# Altium PCB display_psb.PcbDoc
Units mm, origin at the board's own origin, x right, y up, seen from the top; angles counter-clockwise.
Board outline 49.78 x 32 mm, 2 copper layers (Top Layer, Bottom Layer); 35 components, 30 nets, 96 pads, 1 vias.
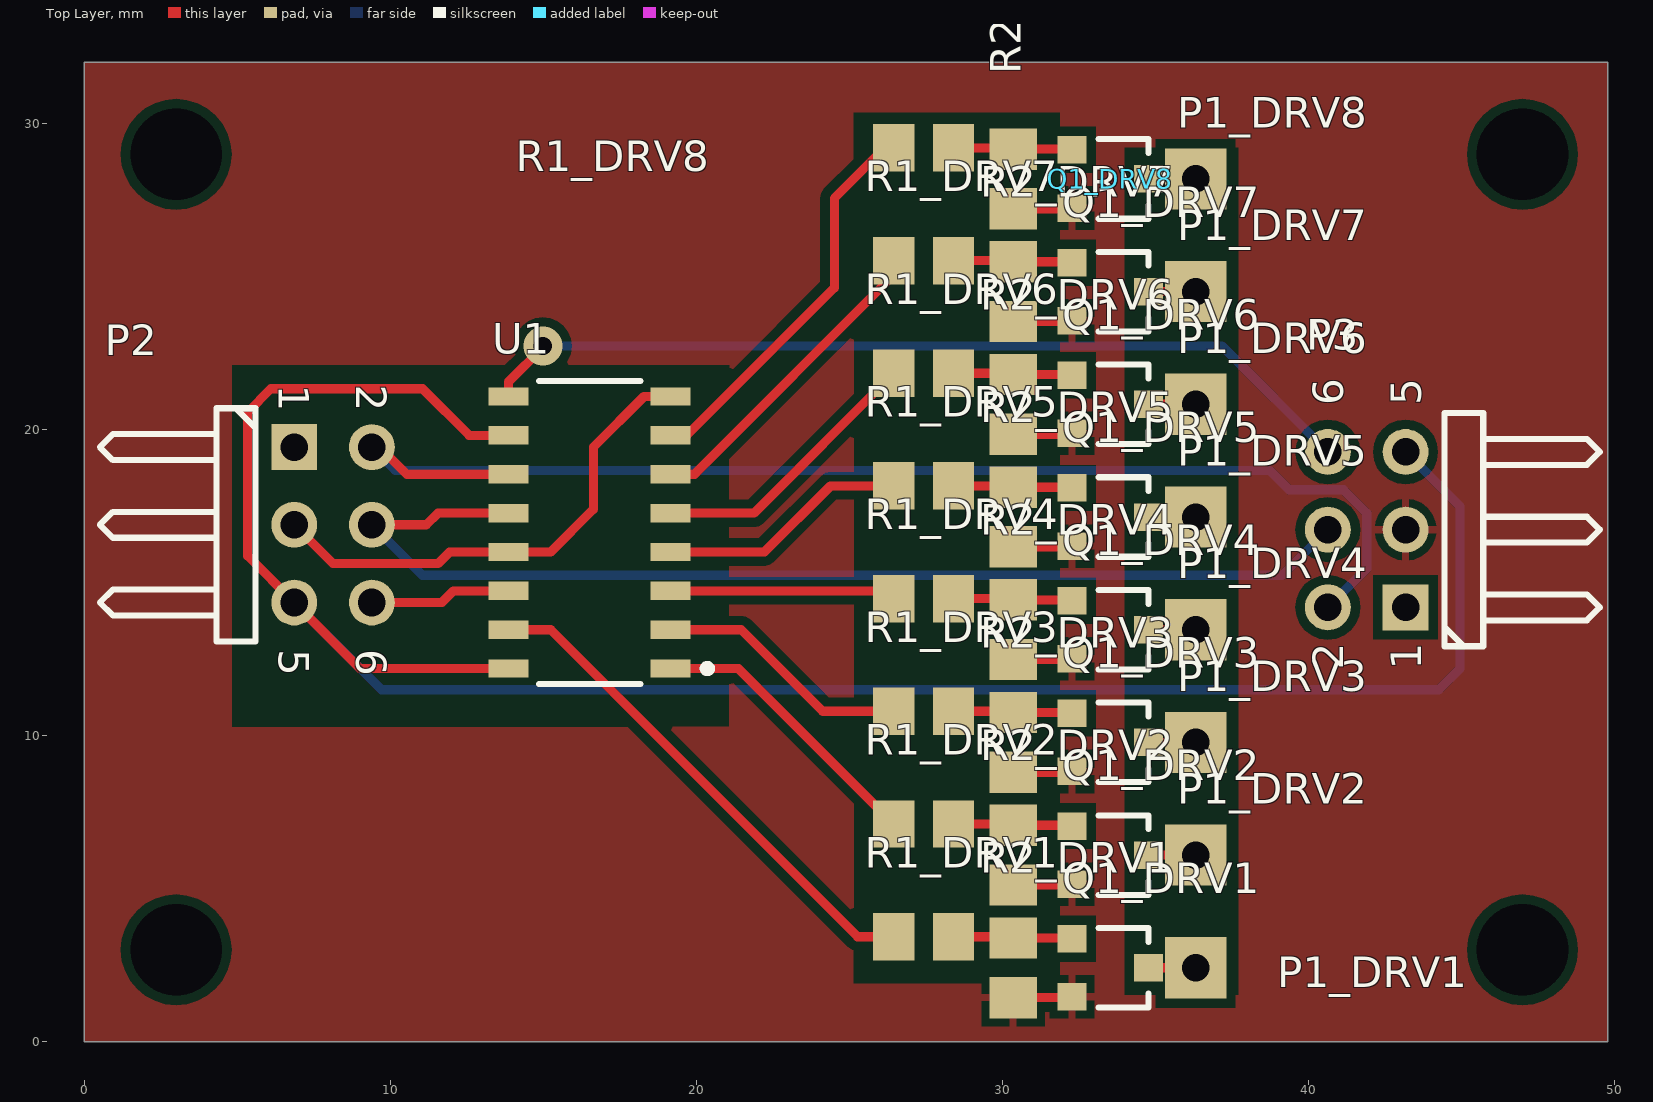
[diagram p0: Top Layer view]
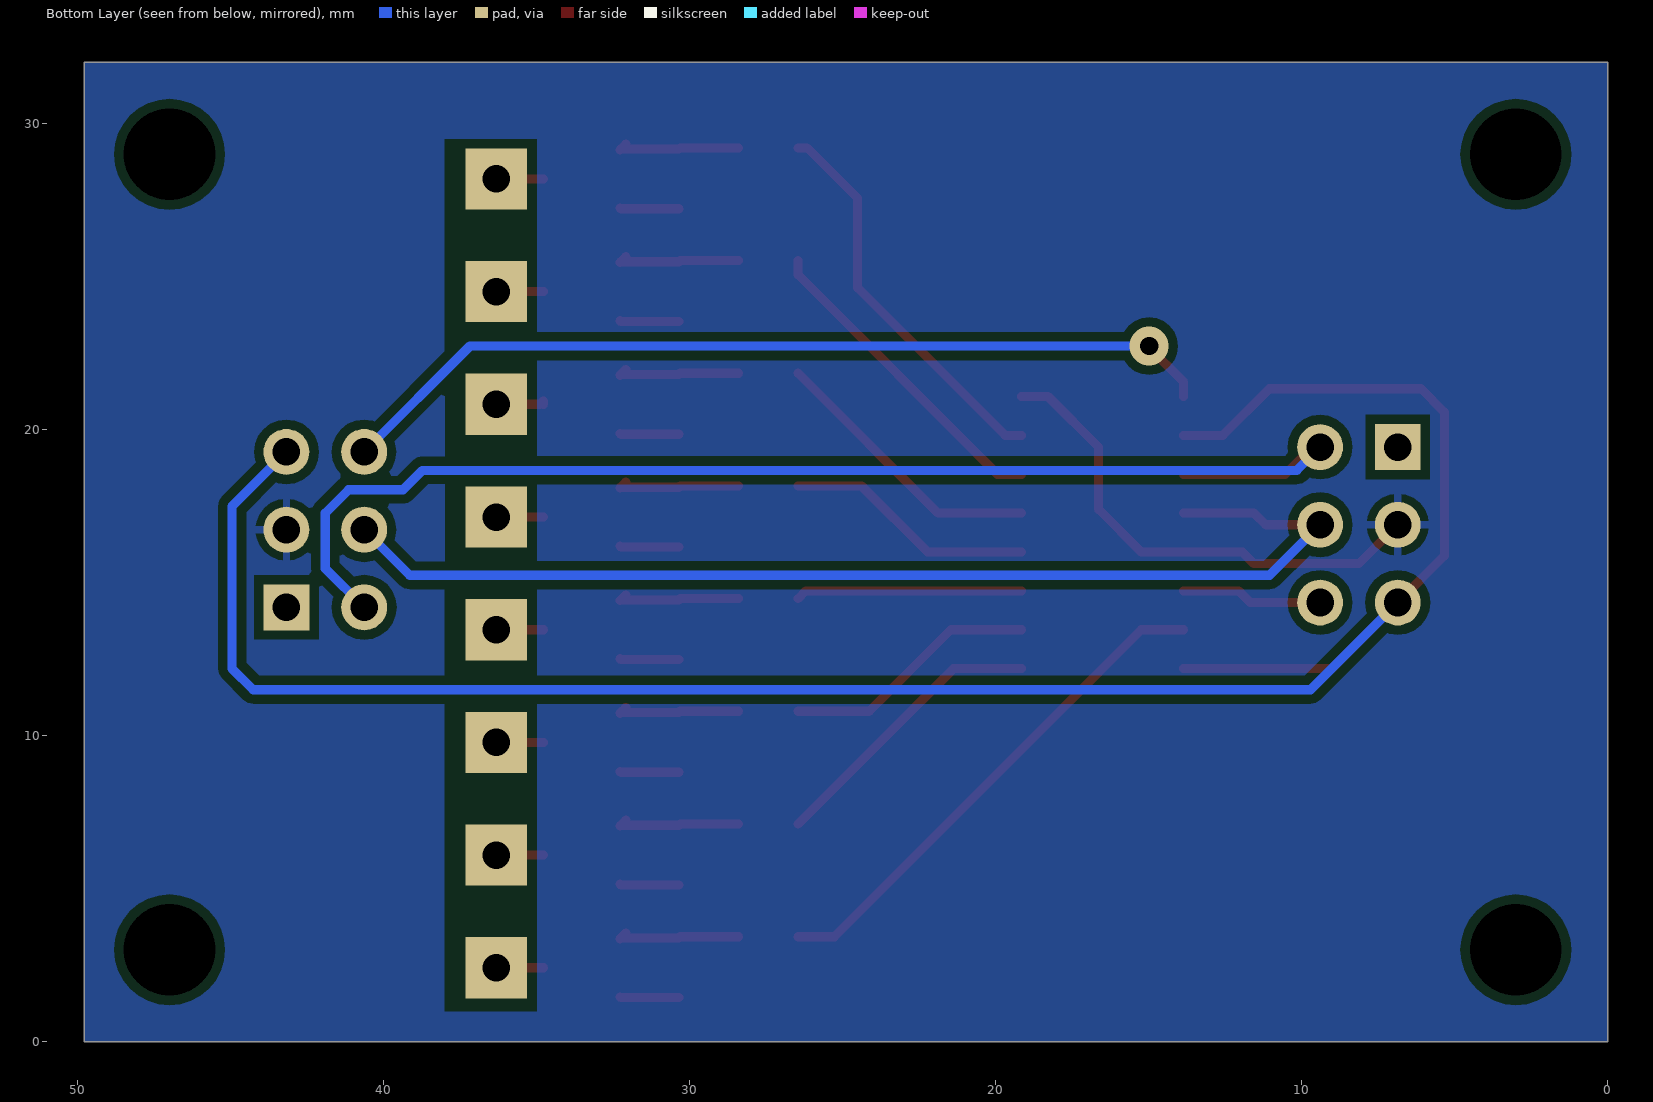
[diagram p1: Bottom Layer view, seen from below]

## Layer stack, top to bottom
Top Solder: solder mask 0.0102, Solder Resist, Dk 3.5
Top Layer: signal copper 0.0356
Dielectric 1: dielectric 0.32, FR-4, Dk 4.8
Bottom Layer: signal copper 0.0356
Bottom Solder: solder mask 0.0102, Solder Resist, Dk 3.5

## Board outline
0,0 49.784,0 49.784,32.004 0,32.004

## Design rules (kind name [scope] priority, off if disabled: settings)
Clearance Clearance_1 [All vs InNet('GND')] p1: gap=0.3 ignorepadtopadclearanceinfootprint=FALSE
Clearance [All] p2: gap=0.254 ignorepadtopadclearanceinfootprint=FALSE except(0: Arc-Hole Track-Hole SMDPad-Hole THPad-Hole Via-Hole Fill-Hole Poly-Hole Region-Hole Text-Hole)
PolygonConnect [All] p1: connectstyle=Relief reliefconductorwidth=0.254 reliefentries=4 polygonreliefangle="90 Angle" airgapwidth=0.254
RoomDefinition DRV8 [InComponentClass('DRV8')] p1: confinementstyle=ConfineIn formatcopy=TRUE lockcomponents=FALSE outline 25.146,30.734 25.146,25.908 37.592,25.908 37.592,30.734
RoomDefinition DRV7 [InComponentClass('DRV7')] p2: confinementstyle=ConfineIn formatcopy=TRUE lockcomponents=FALSE outline 25.146,27.051 25.146,22.225 37.592,22.225 37.592,27.051
RoomDefinition DRV6 [InComponentClass('DRV6')] p3: confinementstyle=ConfineIn formatcopy=TRUE lockcomponents=FALSE outline 25.146,23.368 25.146,18.542 37.592,18.542 37.592,23.368
RoomDefinition DRV5 [InComponentClass('DRV5')] p4: confinementstyle=ConfineIn formatcopy=TRUE lockcomponents=FALSE outline 25.146,19.685 25.146,14.859 37.592,14.859 37.592,19.685
RoomDefinition DRV4 [InComponentClass('DRV4')] p5: confinementstyle=ConfineIn formatcopy=TRUE lockcomponents=FALSE outline 25.146,16.002 25.146,11.176 37.592,11.176 37.592,16.002
RoomDefinition DRV3 [InComponentClass('DRV3')] p6: confinementstyle=ConfineIn formatcopy=TRUE lockcomponents=FALSE outline 25.146,12.319 25.146,7.493 37.592,7.493 37.592,12.319
RoomDefinition DRV2 [InComponentClass('DRV2')] p7: confinementstyle=ConfineIn formatcopy=TRUE lockcomponents=FALSE outline 25.146,8.636 25.146,3.81 37.592,3.81 37.592,8.636
RoomDefinition DRV1 [InComponentClass('DRV1')] p8: confinementstyle=ConfineIn formatcopy=TRUE lockcomponents=FALSE outline 25.146,4.953 25.146,0.127 37.592,0.127 37.592,4.953
RoutingVias [All] p1: holewidth=0.6 width=1.27 viastyle="Through Hole" minholewidth=0.6 minwidth=1.27 maxholewidth=0.6 maxwidth=1.27
SolderMaskExpansion [All] p1: expansion=0.102
Width [All] p1: maxlimit=0.5 minlimit=0.3 preferedwidth=0.3
30 further rules are at their usual default settings.

## Classes and differential pairs
channel class mosfet: DRV1 DRV2 DRV3 DRV4 DRV5 DRV6 DRV7 DRV8
net class out[0..7]: out0 out1 out2 out3 out4 out5 out6 out7 out8
component class DRV8: P1_DRV8 Q1_DRV8 R1_DRV8 R2_DRV8
component class DRV7: P1_DRV7 Q1_DRV7 R1_DRV7 R2_DRV7
component class DRV6: P1_DRV6 Q1_DRV6 R1_DRV6 R2_DRV6
component class DRV5: P1_DRV5 Q1_DRV5 R1_DRV5 R2_DRV5
component class DRV4: P1_DRV4 Q1_DRV4 R1_DRV4 R2_DRV4
component class DRV3: P1_DRV3 Q1_DRV3 R1_DRV3 R2_DRV3
component class DRV2: P1_DRV2 Q1_DRV2 R1_DRV2 R2_DRV2
component class DRV1: P1_DRV1 Q1_DRV1 R1_DRV1 R2_DRV1
component class display: P2 P3 U1

## Components (designator, comment, footprint, x,y, rotation, side; value= is the part's Value field where it differs from the comment)
P1_DRV1 "pin" pin 36.322,2.413 r0 top (schematic designator P1)
P1_DRV2 "pin" pin 36.322,6.096 r0 top (schematic designator P1)
P1_DRV3 "pin" pin 36.322,9.779 r0 top (schematic designator P1)
P1_DRV4 "pin" pin 36.322,13.462 r0 top (schematic designator P1)
P1_DRV5 "pin" pin 36.322,17.145 r0 top (schematic designator P1)
P1_DRV6 "pin" pin 36.322,20.828 r0 top (schematic designator P1)
P1_DRV7 "pin" pin 36.322,24.511 r0 top (schematic designator P1)
P1_DRV8 "pin" pin 36.322,28.194 r0 top (schematic designator P1)
P2 "Header 3X2H" HDR2X3H 6.858,19.431 r270 top
P3 "Header 3X2H" HDR2X3H 43.18,14.193 r90 top
Q1_DRV1 "AO3400" AO-SOT23-3_V 33.528,2.413 r270 top (schematic designator Q1)
Q1_DRV2 "AO3400" AO-SOT23-3_V 33.528,6.096 r270 top (schematic designator Q1)
Q1_DRV3 "AO3400" AO-SOT23-3_V 33.528,9.779 r270 top (schematic designator Q1)
Q1_DRV4 "AO3400" AO-SOT23-3_V 33.528,13.462 r270 top (schematic designator Q1)
Q1_DRV5 "AO3400" AO-SOT23-3_V 33.528,17.145 r270 top (schematic designator Q1)
Q1_DRV6 "AO3400" AO-SOT23-3_V 33.528,20.828 r270 top (schematic designator Q1)
Q1_DRV7 "AO3400" AO-SOT23-3_V 33.528,24.511 r270 top (schematic designator Q1)
Q1_DRV8 "AO3400" AO-SOT23-3_V 33.528,28.194 r270 top (schematic designator Q1)
R1_DRV1 "1K" RESC2013X70X40ML20T20 27.432,3.429 r180 top (schematic designator R1)
R1_DRV2 "1K" RESC2013X70X40ML20T20 27.432,7.112 r180 top (schematic designator R1)
R1_DRV3 "1K" RESC2013X70X40ML20T20 27.432,10.795 r180 top (schematic designator R1)
R1_DRV4 "1K" RESC2013X70X40ML20T20 27.432,14.478 r180 top (schematic designator R1)
R1_DRV5 "1K" RESC2013X70X40ML20T20 27.432,18.161 r180 top (schematic designator R1)
R1_DRV6 "1K" RESC2013X70X40ML20T20 27.432,21.844 r180 top (schematic designator R1)
R1_DRV7 "1K" RESC2013X70X40ML20T20 27.432,25.527 r180 top (schematic designator R1)
R1_DRV8 "1K" RESC2013X70X40ML20T20 27.432,29.21 r180 top (schematic designator R1)
R2_DRV1 "10K" RESC2013X70X40ML20T20 30.353,2.413 r270 top (schematic designator R2)
R2_DRV2 "10K" RESC2013X70X40ML20T20 30.353,6.096 r270 top (schematic designator R2)
R2_DRV3 "10K" RESC2013X70X40ML20T20 30.353,9.779 r270 top (schematic designator R2)
R2_DRV4 "10K" RESC2013X70X40ML20T20 30.353,13.462 r270 top (schematic designator R2)
R2_DRV5 "10K" RESC2013X70X40ML20T20 30.353,17.145 r270 top (schematic designator R2)
R2_DRV6 "10K" RESC2013X70X40ML20T20 30.353,20.828 r270 top (schematic designator R2)
R2_DRV7 "10K" RESC2013X70X40ML20T20 30.353,24.511 r270 top (schematic designator R2)
R2_DRV8 "10K" RESC2013X70X40ML20T20 30.353,28.194 r270 top (schematic designator R2)
U1 "74HC595D" NXP-SOT109-1_V 16.51,16.637 r90 top

## Footprints (in the part's own frame and the unit in brackets; to place one, negate y for a bottom-side part, rotate by r counter-clockwise, add the part's x,y. Pads: shape width x height; smd on the part's side, far side on the other; paste and mask are expansions set on the pad)
AO-SOT23-3_V [mm] "SOT23, 3-Leads, Body 3.016x2.8mm, Pitch 0.95mm"
  rect 0.9x0.95 smd: 1(-0.95,-1.25) 2(0.95,-1.25) 3(0,1.25)
  silkscreen extent -1.3,-0.38 1.3,1.25, body extent -1.14,-1.25 1.17,1.36, height 1.25
HDR2X3H [mm] "Connector; Header; 3x2 Position; Right Angle"
  rect 1.5x1.5 hole 0.9: 1(0,0)
  round 1.5 hole 0.9: 2(0,2.54) 3(2.54,0) 4(2.54,2.54) 5(5.08,0) 6(5.08,2.54)
  silkscreen extent -1.27,-6.35 6.35,-1.27
NXP-SOT109-1_V [mm] "SOP, 16-Leads, Body 9.9x3.9mm, Pitch 1.27mm"
  rect 0.6x1.3 smd: 1(-4.445,-2.65) 2(-3.175,-2.65) 3(-1.905,-2.65) 4(-0.635,-2.65) 5(0.635,-2.65) 6(1.905,-2.65) 7(3.175,-2.65) 8(4.445,-2.65) 9(4.445,2.65) 10(3.175,2.65) 11(1.905,2.65) 12(0.635,2.65) 13(-0.635,2.65) 14(-1.905,2.65) 15(-3.175,2.65) 16(-4.445,2.65)
  silkscreen extent -4.95,-3.98 4.95,1.66, body extent -4.95,-1.95 4.95,1.95, height 1.75
pin [mm] "Molded Capacitor, 2-Leads, Body 3.20x1.60mm, IPC Medium Density"
  rect 2x2 hole 0.9: 0(0,0)
RESC2013X70X40ML20T20 [mm] "Chip Resistor, 2-Leads, Body 2.00x1.25mm, IPC Low Density"
  rect 1.35x1.55 smd: 1(-0.975,0) 2(0.975,0)
  body extent -1.1,-0.72 1.1,0.72, height 0.7

## Part data
P2 P3: "Header, 3-Pin, Dual row, Right Angle", LatestRevisionDate=17-Jul-2002, LatestRevisionNote="Re-released for DXP Platform.", Publisher="Altium Limited"
Q1_DRV1 Q1_DRV2 Q1_DRV3 Q1_DRV4 Q1_DRV5 Q1_DRV6 Q1_DRV7 Q1_DRV8: library part CMP-0278-00001-1, "N-channel Enhancement Mode Field-Effect Transistor; 5.8A/30V", Drain-Source Voltage Limit="30 V", Gate-Source Voltage Limit="+/-12 V", Junction Temperature="-55 to 150 degC", Manufacturer="Alpha and Omega", Channel Type=N, ComponentLink1Description="Manufacturer URL", ComponentLink1URL=http://www.aosmd.com/, ComponentLink2Description=Datasheet, ComponentLink2URL=http://www.aosmd.com/res/data_sheets/AO3400.pdf, ComponentLink3Description="Package Specification", ComponentLink3URL=http://www.aosmd.com/res/packaging_information/SOT-23.pdf, DatasheetVersion="Rev.8, 12/2011", Mounting Technology="Surface Mount", PackageDescription="3-Pin SOT23, 3.016 x 2.8 mm Body, 0.95 mm Pitch", PackageReference=SOT23, PartNumber=AO3400, Storage Temperature="-55 to 150 degC"
R1_DRV1 R1_DRV2 R1_DRV3 R1_DRV4 R1_DRV5 R1_DRV6 R1_DRV7 R1_DRV8 R2_DRV1 R2_DRV2 R2_DRV3 R2_DRV4 R2_DRV5 R2_DRV6 R2_DRV7 R2_DRV8: library part CMP-2001-04440-2, "RES SMD 150K OHM 1% 1/8W 0805", Case-EIA=0805, Manufacturer=Panasonic, Part Number=ERJ-6ENF1503V, Datasheet=http://industrial.panasonic.com/cdbs/www-data/pdf/RDA0000/AOA0000C86.pdf
U1: library part CMP-2000-04920-1, "8-Bit Serial-In, Serial or Parallel-Out Shift Register with Output Latches, 3-State, 2 to 6 V, -40 to 125 degC, 16-Pin SOP, RoHS, Tube", Logic Case Style=SOIC, Manufacturer="NXP Semiconductors", Operating Temperature Max=125degC, Operating Temperature Min=-40degC, Package Description="16-Pin Small Outline Integrated Circuit, Body 9.9 x 3.9 mm, Pitch 1.27 mm", Package Reference=SOT109-1, Supply Voltage Max=6V, Supply Voltage Min=2V, Datasheet URL=http://datasheet.octopart.com/74HC595D%2C112-Philips-datasheet-11979826.pdf, Datasheet Version="Rev. 6, 12/2011", IC Output Type=TriState, Logic Type=ShiftRegister, Manufacturer URL=http://www.nxp.com/, MSL=MSL1-Unlimited, No. of Elements=1Element, No. of Pins=16Pins, Package URL=http://www.nxp.com/documents/outline_drawing/SOT109-1.pdf, Packaging=Each, Shift Register Function=SerialtoParallel,SerialtoSerial, SVHC=NoSVHC(17-Dec-2014)

## Free pads (board coordinates)
  round 1.524 hole 3: 1(3,3) 1(3,29) 1(47,3) 1(47,29)

## Via types
v1: diameter 1.27, hole 0.6, Top Layer to Bottom Layer, 1 vias

## Nets (pads, with @x,y where several pads share a name; then routed paths per layer and width w, separated by ;. In a path a pad name is that pad's centre, name@x,y a point inside that pad or via, vN(x,y) a via of type N, cw(c..) or ccw(c..) an arc to the next point about the centre after c; other vN are vias at no path point)
+5V: P2.5 P3.5 U1.10 U1.16 | length 71.6
  Top Layer w0.3: U1.16 9.017,12.192 P2.5 5.334,15.875 5.334,20.574 6.096,21.336 11.049,21.336 12.573,19.812 U1.10
  Bottom Layer w0.3: P2.5 9.709,11.5 44.266,11.5 44.958,12.192 44.958,17.495 P3.5
DS: P2.6 U1.14 | length 4.6
  Top Layer w0.3: P2.6 11.684,14.351 12.065,14.732 U1.14
GND: P2.3 P3.3 Q1_DRV1.2 Q1_DRV2.2 Q1_DRV3.2 Q1_DRV4.2 Q1_DRV5.2 Q1_DRV6.2 Q1_DRV7.2 Q1_DRV8.2 R2_DRV1.2 R2_DRV2.2 R2_DRV3.2 R2_DRV4.2 R2_DRV5.2 R2_DRV6.2 R2_DRV7.2 R2_DRV8.2 U1.8 U1.13 | length 31.8
  Top Layer w0.3: P2.3 8.128,15.621 11.557,15.621 11.938,16.002 U1.13 15.24,16.002 16.637,17.399 16.637,19.431 18.288,21.082 U1.8 ; R2_DRV1.2 32.253,1.438 Q1_DRV1.2 ; R2_DRV2.2 32.253,5.121 Q1_DRV2.2 ; R2_DRV3.2 32.253,8.804 Q1_DRV3.2 ; R2_DRV4.2 32.253,12.487 Q1_DRV4.2 ; R2_DRV5.2 32.253,16.17 Q1_DRV5.2 ; R2_DRV6.2 32.253,19.853 Q1_DRV6.2 ; R2_DRV7.2 32.253,23.536 Q1_DRV7.2 ; R2_DRV8.2 32.253,27.219 Q1_DRV8.2
NetP1_DRV1_0: P1_DRV1.0 Q1_DRV1.3 | length 1.5
  Top Layer w0.3: Q1_DRV1.3 P1_DRV1.0
NetP1_DRV2_0: P1_DRV2.0 Q1_DRV2.3 | length 1.5
  Top Layer w0.3: Q1_DRV2.3 P1_DRV2.0
NetP1_DRV3_0: P1_DRV3.0 Q1_DRV3.3 | length 1.5
  Top Layer w0.3: Q1_DRV3.3 P1_DRV3.0
NetP1_DRV4_0: P1_DRV4.0 Q1_DRV4.3 | length 1.5
  Top Layer w0.3: Q1_DRV4.3 P1_DRV4.0
NetP1_DRV5_0: P1_DRV5.0 Q1_DRV5.3 | length 1.5
  Top Layer w0.3: Q1_DRV5.3 P1_DRV5.0
NetP1_DRV6_0: P1_DRV6.0 Q1_DRV6.3 | length 1.7
  Top Layer w0.3: Q1_DRV6.3 34.778,20.935 34.885,20.828 P1_DRV6.0
NetP1_DRV7_0: P1_DRV7.0 Q1_DRV7.3 | length 1.5
  Top Layer w0.3: Q1_DRV7.3 P1_DRV7.0
NetP1_DRV8_0: P1_DRV8.0 Q1_DRV8.3 | length 1.5
  Top Layer w0.3: Q1_DRV8.3 P1_DRV8.0
NetQ1_DRV1_1: Q1_DRV1.1 R1_DRV1.1 R2_DRV1.1 | length 4.1
  Top Layer w0.3: R1_DRV1.1 30.312,3.429 R2_DRV1.1 Q1_DRV1.1@32.253,3.388 ; Q1_DRV1.1@32.09,3.551 Q1_DRV1.1@32.253,3.388 ; Q1_DRV1.1 Q1_DRV1.1@32.253,3.388
NetQ1_DRV2_1: Q1_DRV2.1 R1_DRV2.1 R2_DRV2.1 | length 4.1
  Top Layer w0.3: R1_DRV2.1 30.312,7.112 R2_DRV2.1 Q1_DRV2.1@32.253,7.071 ; Q1_DRV2.1@32.09,7.234 Q1_DRV2.1@32.253,7.071 ; Q1_DRV2.1 Q1_DRV2.1@32.253,7.071
NetQ1_DRV3_1: Q1_DRV3.1 R1_DRV3.1 R2_DRV3.1 | length 4.1
  Top Layer w0.3: R1_DRV3.1 30.312,10.795 R2_DRV3.1 Q1_DRV3.1@32.253,10.754 ; Q1_DRV3.1@32.09,10.917 Q1_DRV3.1@32.253,10.754 ; Q1_DRV3.1 Q1_DRV3.1@32.253,10.754
NetQ1_DRV4_1: Q1_DRV4.1 R1_DRV4.1 R2_DRV4.1 | length 4.1
  Top Layer w0.3: R1_DRV4.1 30.312,14.478 R2_DRV4.1 Q1_DRV4.1@32.253,14.437 ; Q1_DRV4.1@32.09,14.6 Q1_DRV4.1@32.253,14.437 ; Q1_DRV4.1 Q1_DRV4.1@32.253,14.437
NetQ1_DRV5_1: Q1_DRV5.1 R1_DRV5.1 R2_DRV5.1 | length 4.1
  Top Layer w0.3: R1_DRV5.1 30.312,18.161 R2_DRV5.1 Q1_DRV5.1@32.253,18.12 ; Q1_DRV5.1@32.09,18.283 Q1_DRV5.1@32.253,18.12 ; Q1_DRV5.1 Q1_DRV5.1@32.253,18.12
NetQ1_DRV6_1: Q1_DRV6.1 R1_DRV6.1 R2_DRV6.1 | length 4.1
  Top Layer w0.3: R1_DRV6.1 30.312,21.844 R2_DRV6.1 Q1_DRV6.1@32.253,21.803 ; Q1_DRV6.1@32.09,21.966 Q1_DRV6.1@32.253,21.803 ; Q1_DRV6.1 Q1_DRV6.1@32.253,21.803
NetQ1_DRV7_1: Q1_DRV7.1 R1_DRV7.1 R2_DRV7.1 | length 4.1
  Top Layer w0.3: R1_DRV7.1 30.312,25.527 R2_DRV7.1 Q1_DRV7.1@32.253,25.486 ; Q1_DRV7.1@32.09,25.649 Q1_DRV7.1@32.253,25.486 ; Q1_DRV7.1 Q1_DRV7.1@32.253,25.486
NetQ1_DRV8_1: Q1_DRV8.1 R1_DRV8.1 R2_DRV8.1 | length 4.1
  Top Layer w0.3: R1_DRV8.1 30.312,29.21 R2_DRV8.1 Q1_DRV8.1@32.253,29.169 ; Q1_DRV8.1@32.09,29.332 Q1_DRV8.1@32.253,29.169 ; Q1_DRV8.1 Q1_DRV8.1@32.253,29.169
out1: R1_DRV1.2 U1.15 | length 16.8
  Top Layer w0.3: U1.15 15.24,13.462 25.273,3.429 R1_DRV1.2
out2: R1_DRV2.2 U1.1 | length 9.4
  Top Layer w0.3: U1.1 21.377,12.192 R1_DRV2.2
out3: R1_DRV3.2 U1.2 | length 8.4
  Top Layer w0.3: U1.2 21.463,13.462 24.13,10.795 R1_DRV3.2
out4: R1_DRV4.2 U1.3 | length 7.4
  Top Layer w0.3: U1.3 26.203,14.732 R1_DRV4.2
out5: R1_DRV5.2 U1.4 | length 8.2
  Top Layer w0.3: U1.4 22.225,16.002 24.384,18.161 R1_DRV5.2
out6: R1_DRV6.2 U1.5 | length 9.2
  Top Layer w0.3: U1.5 21.885,17.272 R1_DRV6.2
out7: R1_DRV7.2 U1.6 | length 10.5
  Top Layer w0.3: U1.6 19.939,18.542 26.457,25.06 R1_DRV7.2
out8: R1_DRV8.2 U1.7 | length 12.9
  Top Layer w0.3: U1.7 19.685,19.812 24.511,24.638 24.511,27.559 26.162,29.21 R1_DRV8.2
QS7: P3.6 U1.9 | length 29.2
  Top Layer w0.3: U1.9 13.86,21.563 v1@15.008,22.711
  Bottom Layer w0.3: v1(14.986,22.733) 37.18,22.733 P3.6
SHCP: P2.2 P3.2 U1.11 | length 41.8
  Top Layer w0.3: P2.2 9.652,19.431 10.541,18.542 U1.11
  Bottom Layer w0.3: P2.2 10.16,18.669 38.735,18.669 39.37,18.034 41.148,18.034 41.91,17.272 41.91,15.463 P3.2
STCP: P2.4 P3.4 U1.12 | length 37.2
  Top Layer w0.3: P2.4 11.176,16.891 11.557,17.272 U1.12
  Bottom Layer w0.3: P2.4 11.049,15.24 39.147,15.24 P3.4
pads on no net: P2.1 P3.1

## Polygon pours and split planes (outlines as drawn)
GND on Top Layer "Top Layer-No Net" (solid, pour order 2): 49.784,32.004 0,32.004 0,0 49.784,0
GND on Bottom Layer "Bottom Layer-No Net" (solid, pour order 0): 0,32.004 49.784,32.004 49.784,0 0,0

## Other copper
Top Layer:
  pour cut-out: 34.003,29.21 37.719,29.21 37.719,1.524 34.003,1.524
  pour cut-out: 4.826,22.098 21.082,22.098 21.082,10.287 4.826,10.287
  pour cut-out: 25.146,30.353 31.877,30.353 31.877,1.905 25.146,1.905
Bottom Layer:
  pour cut-out: 35,29.5 38,29.5 38,1 35,1

## Silkscreen, mask and mechanical layers (free items; w line width, h text height)
bord:
  the board outline again, w0.2

## Text inside footprints (layer, text, board x,y; h text height)
P2: Top Overlay "2" at 8.89,21.463 h1 r270; Top Overlay "1" at 6.35,21.463 h1 r270; Top Overlay "5" at 6.35,12.827 h1 r270; Top Overlay "6" at 8.89,12.827 h1 r270
P3: Top Overlay "2" at 41.148,12.161 h1 r90; Top Overlay "1" at 43.688,12.161 h1 r90; Top Overlay "5" at 43.688,20.797 h1 r90; Top Overlay "6" at 41.148,20.797 h1 r90